# Altium PCB ColdBlock_PID_LCD00.PcbDoc
Units mil, origin at the board's own origin, x right, y up, seen from the top; angles counter-clockwise.
Board outline 4335 x 1455 mil, 2 copper layers (Top Layer, Bottom Layer); 19 components, 21 nets, 80 pads, 0 vias.
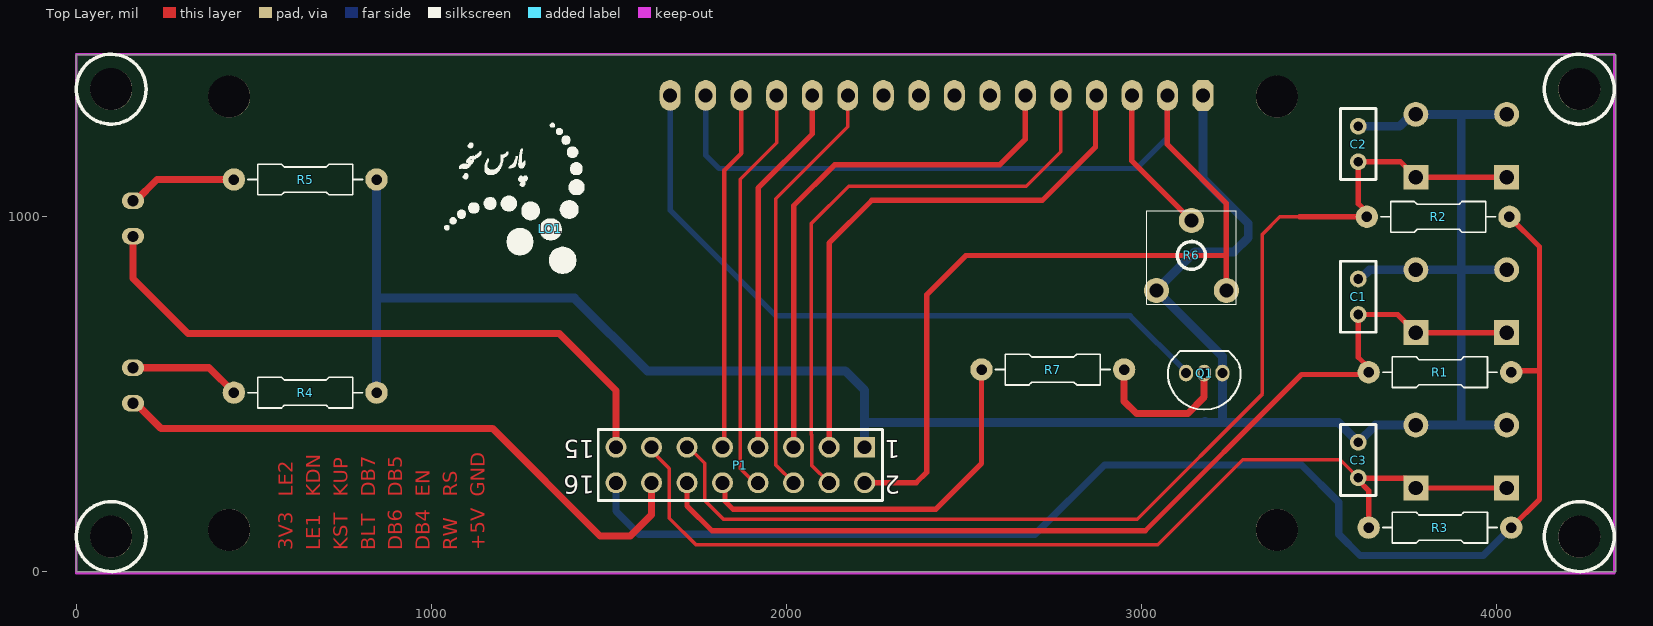
[diagram p0: Top Layer view]
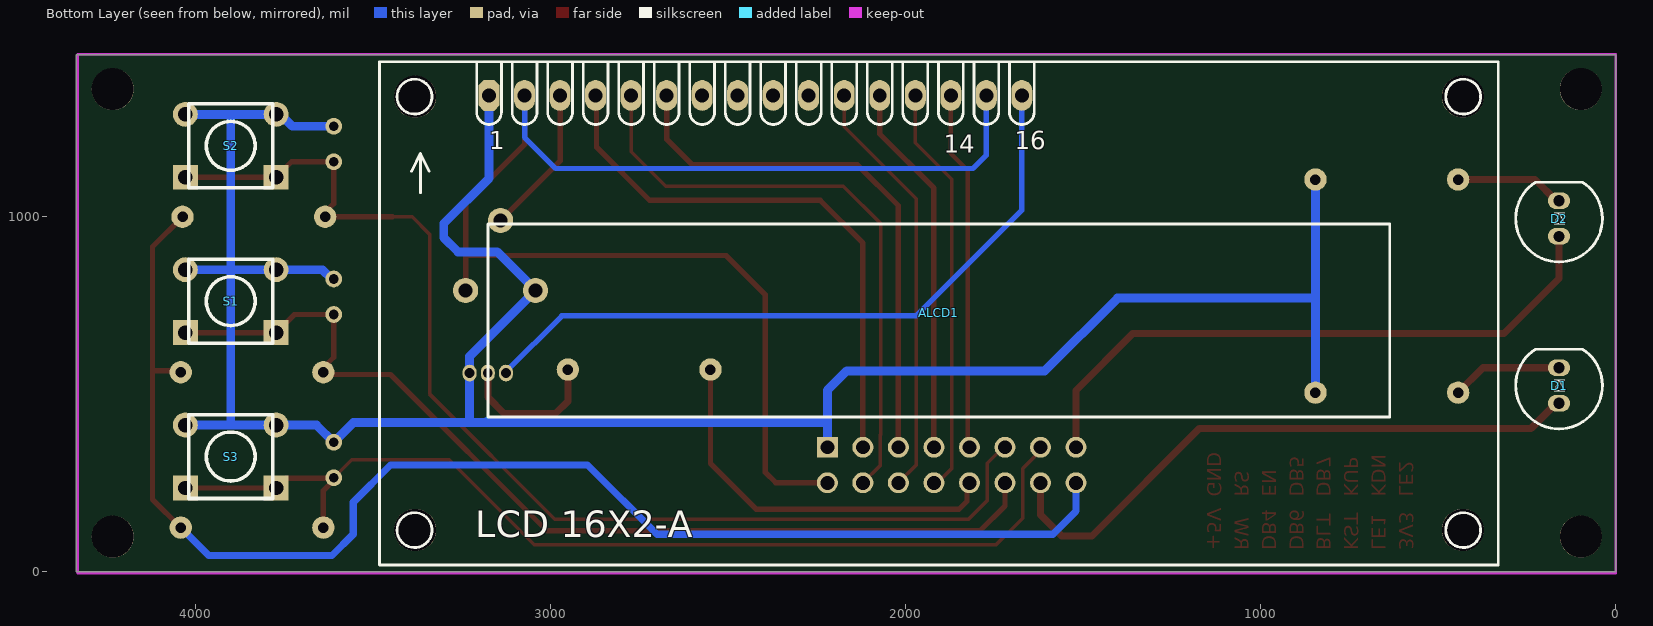
[diagram p1: Bottom Layer view, seen from below]
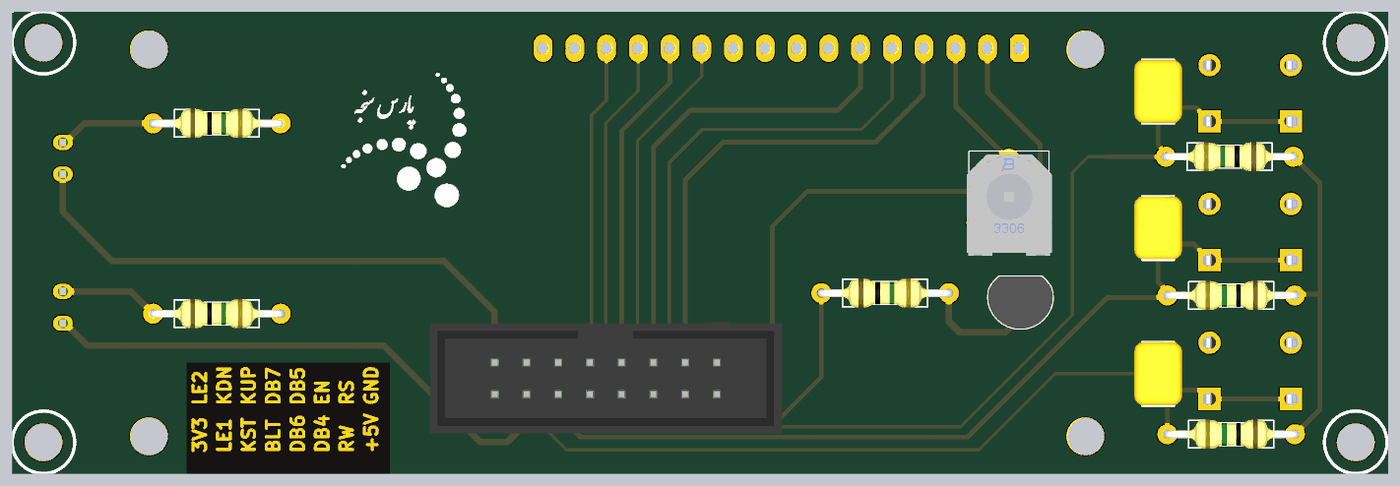
[diagram p2: 3D render of the assembled board from above, using the file's embedded part models]
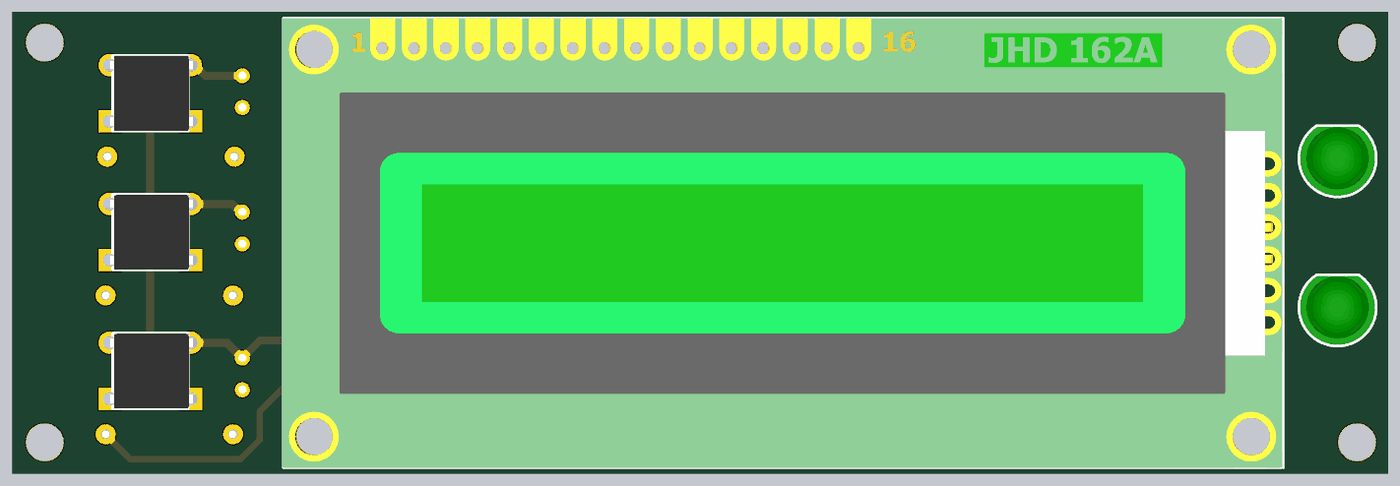
[diagram p3: 3D render of the assembled board from below, using the file's embedded part models]

## Layer stack, top to bottom
Top Solder: solder mask 0.4, Solder Resist, Dk 3.5
Top Layer: signal copper 1.4
Dielectric 1: dielectric 12.6, FR-4, Dk 4.8
Bottom Layer: signal copper 1.4
Bottom Solder: solder mask 0.4, Solder Resist, Dk 3.5

## Board outline
0,0 4335,0 4335,1455 0,1455

## Design rules (kind name [scope] priority, off if disabled: settings)
Clearance [All] p1: gap=15 ignorepadtopadclearanceinfootprint=TRUE
ComponentClearance [All] p1: gap=0 collisioncheckmode=3 verticalgap=0 showdistances=FALSE
HoleSize [All] p1: absolutevalues=TRUE maxlimit=700 minlimit=1 maxpercent=80.000 minpercent=20.000
PolygonConnect [All] p1: connectstyle=Relief reliefconductorwidth=10 reliefentries=4 polygonreliefangle="90 Angle" airgapwidth=10
RoutingVias [All] p1: holewidth=28 width=50 viastyle="Through Hole" minholewidth=28 minwidth=50 maxholewidth=28 maxwidth=50
SolderMaskExpansion [All] p1: expansion=4
Width [All] p1: maxlimit=50 minlimit=10 preferedwidth=15 minimp=50.000000 maximp=50.000000 favimp=50.000000
28 further rules are at their usual default settings.

## Components (designator, comment, footprint, x,y, rotation, side; value= is the part's Value field where it differs from the comment)
ALCD1 "LCD2X16_Alphanumeric" "LCD_2X16 GREEN - 2.5mm" 2012.46,698.82 r180 bottom
C1 "Cap" CAP_MLCC_RAD_0.1 3609.87,773.82 r90 top value=100nF
C2 "Cap" CAP_MLCC_RAD_0.1 3609.87,1203.82 r90 top value=100nF
C3 "Cap" CAP_MLCC_RAD_0.1 3609.87,313.82 r90 top value=100nF
D1 "LED1" LED5MM_BLUE 159.87,523.82 r90 bottom
D2 "LED1" LED5MM_BLUE 159.87,993.82 r90 bottom
LO1 "Logo" LOGO_PARS_TOP 1335,965 r0 top
P1 "Header 8X2" IDC2.54_16PIN 1870,300 r0 top
Q1 "2N3904" "TO-92 STR" 3176.05,558.82 r180 top
R1 "Res1" "Axial 0_25 W, 0_4 IN LEAD PITCH" 3839.87,561.31 r180 top value=10K
R2 "Res1" "Axial 0_25 W, 0_4 IN LEAD PITCH" 3834.87,998.82 r180 top value=10K
R3 "Res1" "Axial 0_25 W, 0_4 IN LEAD PITCH" 3839.87,123.82 r180 top value=10K
R4 "Res1" "Axial 0_25 W, 0_4 IN LEAD PITCH" 644.87,503.82 r0 top value=100
R5 "Res1" "Axial 0_25 W, 0_4 IN LEAD PITCH" 644.87,1103.82 r0 top value=100
R6 "RPot" Potentiometer_EVND8 3140,890 r0 top value=10K
R7 "Res1" "Axial 0_25 W, 0_4 IN LEAD PITCH" 2749.87,568.82 r0 top value=1K
S1 "SW-PB" SW-4PIN 3899.87,761.32 r180 bottom
S2 "SW-PB" SW-4PIN 3899.87,1198.82 r180 bottom
S3 "SW-PB" SW-4PIN 3899.87,323.82 r180 bottom

## Footprints (in the part's own frame and the unit in brackets; to place one, negate y for a bottom-side part, rotate by r counter-clockwise, add the part's x,y. Pads: shape width x height; smd on the part's side, far side on the other; paste and mask are expansions set on the pad)
"Axial 0_25 W, 0_4 IN LEAD PITCH" [mm] "Designer Abbas Basereh"
  round 1.6 hole 0.75: 1(5.1,0) 2(-5.1,0)
  silkscreen extent -4.1,-1.1 4.1,1.1, body extent -5.4,-1.16 5.36,1.16, height 3.63
CAP_MLCC_RAD_0.1 [mm]
  round 1.2 hole 0.7: 1(-1.27,0) 2(1.27,0)
  silkscreen extent -2.54,-1.27 2.54,1.27, body extent -2.51,-1.91 2.57,1.91, height 7.36
IDC2.54_16PIN [mm]
  rect 1.5x1.5 hole 1: 1(8.89,1.27)
  round 1.5 hole 1: 2(8.89,-1.27) 3(6.35,1.27) 4(6.35,-1.27) 5(3.81,1.27) 6(3.81,-1.27) 7(1.27,1.27) 8(1.27,-1.27) 9(-1.27,1.27) 10(-1.27,-1.27) 11(-3.81,1.27) 12(-3.81,-1.27) 13(-6.35,1.27) 14(-6.35,-1.27) 15(-8.89,1.27) 16(-8.89,-1.27)
  silkscreen extent -10.16,-2.54 10.16,2.54, body extent -14.06,-4.4 14.06,4.5, height 9
"LCD_2X16 GREEN - 2.5mm" [mm] "LCD 2x16 Alphanumberic-Designer Abbas Basereh"
  oct 1.5x2.2 hole 1: 1(-29.464,16.3)
  oval 1.5x2.2 hole 1: 2(-26.924,16.3) 3(-24.384,16.3) 4(-21.844,16.3) 5(-19.304,16.3) 6(-16.764,16.3) 7(-14.224,16.3) 8(-11.684,16.3) 9(-9.144,16.3) 10(-6.604,16.3) 11(-4.064,16.3) 12(-1.524,16.3) 13(1.016,16.3) 14(3.556,16.3) 15(6.096,16.3) 16(8.636,16.3)
  round 3 hole 3: ""(-34.756,16.213) ""(-34.756,-14.775) ""(40.174,-14.775) ""(40.174,16.213)
  silkscreen extent -37.3,-17.29 42.7,18.71, body extent -37.35,-17.3 42.65,18.7, height 13.1
LED5MM_BLUE [mm] "LED 5MM THROUGH HOLE BLUE-Designer Abbas Basereh"
  oval 1.2x1.6 hole 0.8: 1(-1.27,0) 2(1.27,0)
  silkscreen extent -3.1,-3.1 2.6,3.1, body extent -3,-3 2.5,3, height 9.14
LOGO_PARS_TOP [mil]
  silkscreen extent -298,-125 96,298
Potentiometer_EVND8 [mm]
  round 1.8 hole 1: 1(-2.5,-2.5) 2(2.5,-2.5) 3(0,2.5)
  silkscreen extent -3.2,-3.5 3.2,3.2, body extent -3.38,-5.18 3.43,2.95, height 8.04
SW-4PIN [mm]
  rect 1.784x1.784 hole 1.03: 1(-3.25,-2.25) 1(3.25,-2.25)
  round 1.784 hole 1.03: 2(-3.25,2.25) 2(3.25,2.25)
  silkscreen extent -3,-3 3,3, body extent -3.85,-3 3.8,3, height 9.65
"TO-92 STR" [mm] "DESIGNER :ABBAS BASEREH"
  oval 1x1.2 hole 0.7 mask+0.06: 1(-1.3,0) 2(0,0) 3(1.3,0)
  silkscreen extent -2.6,-1.59 2.6,2.61, body extent -2.61,-1.59 2.61,2.61, height 10

## Part data
C1 C2 C3: "Capacitor", LatestRevisionDate=17-Jul-2002, LatestRevisionNote="Re-released for DXP Platform.", PackageDescription="Radial Cap, Thru-Hole; 2 Leads; 0.3 in Pin Spacing", PackageReference=RAD-0.3, Published=8-Jun-2000, Publisher="Altium Limited"
D1 D2: "Typical RED GaAs LED", LatestRevisionDate=08-Jul-2005, LatestRevisionNote="Mech Layer 1 removed.", PackageDescription="LED; 2 Leads", PackageReference=LED-1, Published=8-Jun-2000, Publisher="Altium Limited"
P1: "Header, 8-Pin, Dual row", LatestRevisionDate=17-Jul-2002, LatestRevisionNote="Re-released for DXP Platform.", Publisher="Altium Limited"
Q1: "NPN General Purpose Amplifier", ComponentLink1Description="Manufacturer Link", ComponentLink1URL=http://www.fairchildsemi.com/, ComponentLink2Description=Datasheet, ComponentLink2URL=http://www.fairchildsemi.com/ds/2N%2F2N3904.pdf, DatasheetVersion=1997, LatestRevisionDate=15-Jan-2003, LatestRevisionNote="PCB Footprint 'BCY-W3/D4.7' replaced", PackageDescription="TO, Flat Index; 3 In-Line, Axial Leads; Body Dia. 4.5mm; Leads 0.51 x 0.48 mm (max)", PackageReference=TO-92A, PackageVersion=Sep-1998, Published=8-Jun-2000, Publisher="Altium Limited"
R1 R2 R3 R4 R5 R7: "Resistor", LatestRevisionDate=17-Jul-2002, LatestRevisionNote="Re-released for DXP Platform.", PackageDescription="Axial Device, Thru-Hole; 2 Leads; 0.3 in Pin Spacing", PackageReference=AXIAL-0.3, Published=8-Jun-2000, Publisher="Altium Limited"
R6: "Potentiometer", LatestRevisionDate=17-Jul-2002, LatestRevisionNote="Re-released for DXP Platform.", PackageDescription="Variable Resistor, Thru-Hole; 3 Leads", PackageReference=VR5, Published=8-Jun-2000, Publisher="Altium Limited", Set Position=0.5, Sim Note="Enter the Resistance value and the set point into parameter fields."
S1 S2 S3: "Switch", LatestRevisionDate=17-Jul-2002, LatestRevisionNote="Re-released for DXP Platform.", PackageDescription="Switch; 2 Leads", PackageReference=SPST-2, Published=24-Mar-1999, Publisher="Altium Limited"
ALCD1: Data=16-12-2016, Designer="Abbas Basereh"

## Free pads (board coordinates)
  round 118.11 hole 118.11: ""(98.43,98.43) ""(98.43,1358.27) ""(4232.28,98.43) ""(4232.28,1358.27)

## Nets (pads, with @x,y where several pads share a name; then routed paths per layer and width w, separated by ;. In a path a pad name is that pad's centre, name@x,y a point inside that pad or via, vN(x,y) a via of type N, cw(c..) or ccw(c..) an arc to the next point about the centre after c; other vN are vias at no path point)
+3V3: P1.16 R1.2 R2.2 R3.2 | length 3923
  Top Layer w15: R2.2 4120,914.47 4120,565 ; R3.2 4120,203.16 4120,565 ; R1.2 4044.34,565 4120,565
  Bottom Layer w20: P1.16 1520,170 1585,105 2700,105 2895,300 3450,300 3555,195 3555,105 3615,45 3961.84,45 R3.2
+5V: ALCD1.2 ALCD1.15 P1.2 R6.2 | length 3832
  Top Layer w15: P1.2 2365,250 2395,280 2395,780 2505,890 3238.43,890 ; ALCD1.2 3072.46,1202.54 3238.43,1036.57 3238.43,890 ; R6.2 3238.43,890
  Bottom Layer w15: ALCD1.15 1772.46,1172.54 1810,1135 2985,1135 3072.46,1222.46 ALCD1.2
GND: ALCD1.1 C1.2 C2.2 C3.2 P1.1 Q1.1 R4.1 R5.1 R6.1 S1.2 S2.2 S3.2 | length 7056.3
  Bottom Layer w25: R4.1 845.65,770 ; R5.1 845.65,770 ; P1.1 2220,420 ; ALCD1.1 3172.46,1107.54 3300,980 3300,940 3260,900 3150,900 R6.1 3227.23,605.92 Q1.1 3227.23,422.23 3225,420 ; 3178.32,423.32 3175,420 ; C1.2 3615.88,823.82 3641.97,849.9 3771.91,849.9 3899.87,849.9 ; C2.2 3726.09,1253.82 3759.67,1287.4 3771.91,1287.4 3899.87,1287.4 ; S3.2@4027.82,412.4 3899.87,412.4 ; S1.2@4027.82,849.9 3899.87,849.9 ; S2.2@4027.82,1287.4 3899.87,1287.4 ; 845.65,770 1402.83,770 1607.83,565 2165,565 2220,510 2220,420 ; 2220,420 3175,420 ; 3175,420 3225,420 ; 3225,420 3553.68,420 C3.2 3658.45,412.4 3771.91,412.4 3899.87,412.4 ; 3899.87,412.4 3899.87,849.9 ; 3899.87,849.9 3899.87,1287.4
KEY_DN: C3.1 P1.13 R3.1 S3.1 | length 2894.1
  Top Layer w10: P1.13 1620,340 1670,290 1670,150 1745,75 3045,75 3285,315 3558.68,315 C3.1
  Top Layer w15: R3.1 3639.08,227.8 3609.87,257.01 C3.1 3610.83,262.86 3744.29,262.86 3771.91,235.23 S3.1@4027.82,235.23
KEY_SET: C1.1 P1.12 R1.1 S1.1 | length 2811.7
  Top Layer w15: P1.12 1720,185 1790,115 3010,115 3450,555 3632.76,555 R1.1 3639.08,574.3 3609.87,603.51 C1.1 3720.83,723.82 3771.91,672.73 S1.1@4027.82,672.73
KEY_UP: C2.1 P1.11 R2.1 S2.1 | length 3276.7
  Top Layer w10: P1.11 1725,350 1770,305 1770,200 1822.5,147.5 2987.5,147.5 3340,500 3340,950 3388.82,998.82 3445,998.82
  Top Layer w15: 3445,998.82 R2.1 3634.08,1011.8 3609.87,1036.01 C2.1 3728.33,1153.82 3771.91,1110.23 S2.1@4027.82,1110.23
LCD_BKLT: P1.10 R7.2 | length 1126.6
  Top Layer w15: R7.2 2549.08,304.08 2420,175 1865,175 1850,175 1827.03,197.97 P1.10@1827.03,231.05 ; P1.10@1827.03,231.05 1827.03,242.97 P1.10 1820,238.08 P1.10@1827.03,231.05
LCD_DB4: ALCD1.11 P1.6 | length 1195.1
  Top Layer w10: P1.6 1970,300 1970,1050 2172.46,1252.46 ALCD1.11
LCD_DB5: ALCD1.12 P1.7 | length 1053.7
  Top Layer w15: P1.7 1920,1080 2072.46,1232.46 ALCD1.12
LCD_DB6: ALCD1.13 P1.8 | length 1159.6
  Top Layer w10: P1.8@1910,250 1870,290 1870,325 1870,1105 1972.46,1207.46 ALCD1.13
  Top Layer w15: P1.8@1910,250 P1.8
LCD_DB7: ALCD1.14 P1.9 | length 1012.3
  Top Layer w12: P1.9 1825,355 1825,1130 1872.46,1177.46 ALCD1.14
LCD_EN: ALCD1.6 P1.5 | length 1533.2
  Top Layer w15: P1.5 2020,1030 2135,1145 2600,1145 2672.46,1217.46 ALCD1.6
LCD_RS: ALCD1.4 P1.3 | length 1583.4
  Top Layer w15: P1.3 2120,925 2240,1045 2720,1045 2870,1195 2870,1338.08 ALCD1.4
LCD_RW: ALCD1.5 P1.4 | length 1695.1
  Top Layer w10: P1.4 2070.47,299.53 2070.47,384.53 2070,385 2070,980 2175,1085 2675,1085 2772.46,1182.46 ALCD1.5
LED1: D1.1 P1.14 | length 1729.8
  Top Layer w20: D1.1 167.74,473.82 238.28,403.28 1171.72,403.28 1475,100 1560,100 1620,160 P1.14
LED2: D2.1 P1.15 | length 1769.3
  Top Layer w20: D2.1 159.87,825.13 315,670 1360,670 1520,510 P1.15
NetALCD1_3: ALCD1.3 R6.3 | length 421.5
  Top Layer w15: ALCD1.3 2972.46,1155.96 R6.3
NetALCD1_16: ALCD1.16 Q1.3 | length 1967.7
  Bottom Layer w15: ALCD1.16 1672.46,1017.54 1970,720 2967.62,720 3124.87,562.75 Q1.3
NetD1_2: D1.2 R4.2 | length 313.2
  Top Layer w20: D1.2 374.08,573.82 R4.2
NetD2_2: D2.2 R5.2 | length 309.1
  Top Layer w20: D2.2 167.74,1043.82 227.74,1103.82 R5.2
NetQ1_2: Q1.2 R7.1 | length 415.9
  Top Layer w20: R7.1 2950.65,479.35 2985,445 3130,445 3176.05,491.05 Q1.2
pads on no net: ALCD1. ALCD1.7 ALCD1.8 ALCD1.9 ALCD1.10

## Polygon pours and split planes (outlines as drawn)
no net on Top Solder (solid): 550,350 1190,350 1190,0 550,0

## Keep-outs
Keep-Out Layer:
  lines w8: 0,-5 0,1456.69 4330.71,1456.69 4330.71,-5 0,-5

## Other copper
Top Layer:
  text "LE2" at 610,210 h40 r90
  text "KDN" at 687.14,210 h40 r90
  text "KUP" at 764.29,210 h40 r90
  text "DB7" at 841.43,210 h40 r90
  text "DB5" at 918.57,210 h40 r90
  text "EN" at 995.71,210 h40 r90
  text "RS" at 1072.86,210 h40 r90
  text "GND" at 1150,210 h40 r90
  text "3V3" at 610,60 h40 r90
  text "LE1" at 687.14,60 h40 r90
  text "KST" at 764.29,60 h40 r90
  text "BLT" at 841.43,60 h40 r90
  text "DB6" at 918.57,60 h40 r90
  text "DB4" at 995.71,60 h40 r90
  text "RW" at 1072.86,60 h40 r90
  text "+5V" at 1150,60 h40 r90

## Silkscreen, mask and mechanical layers (free items; w line width, h text height)
Top Overlay:
  circle w10: c4232.28,98.43 r98.43
  circle w10: c4232.28,1358.27 r98.43
  circle w10: c98.43,98.43 r98.43
  circle w10: c98.43,1358.27 r98.43

## Dimensions
0,1456.69 to 0,-5 on Top Overlay
4330.71,-5 to 0,-5 on Top Overlay

## Text inside footprints (layer, text, board x,y; h text height)
ALCD1: Bottom Overlay "LCD 16X2-A" at 3210.81,97.12 h75; Bottom Overlay "16" at 1692.46,1188.82 h50; Bottom Overlay "1" at 3172.46,1188.82 h50; Bottom Overlay "14" at 1892.46,1178.82 h50
P1: Top Overlay "16" at 1460,270 h50 r180; Top Overlay "15" at 1460,370 h50 r180; Top Overlay "1" at 2320,370 h50 r180; Top Overlay "2" at 2320,270 h50 r180